# EAGLE board fabenergy.node.v2 (EAGLE 5.11)
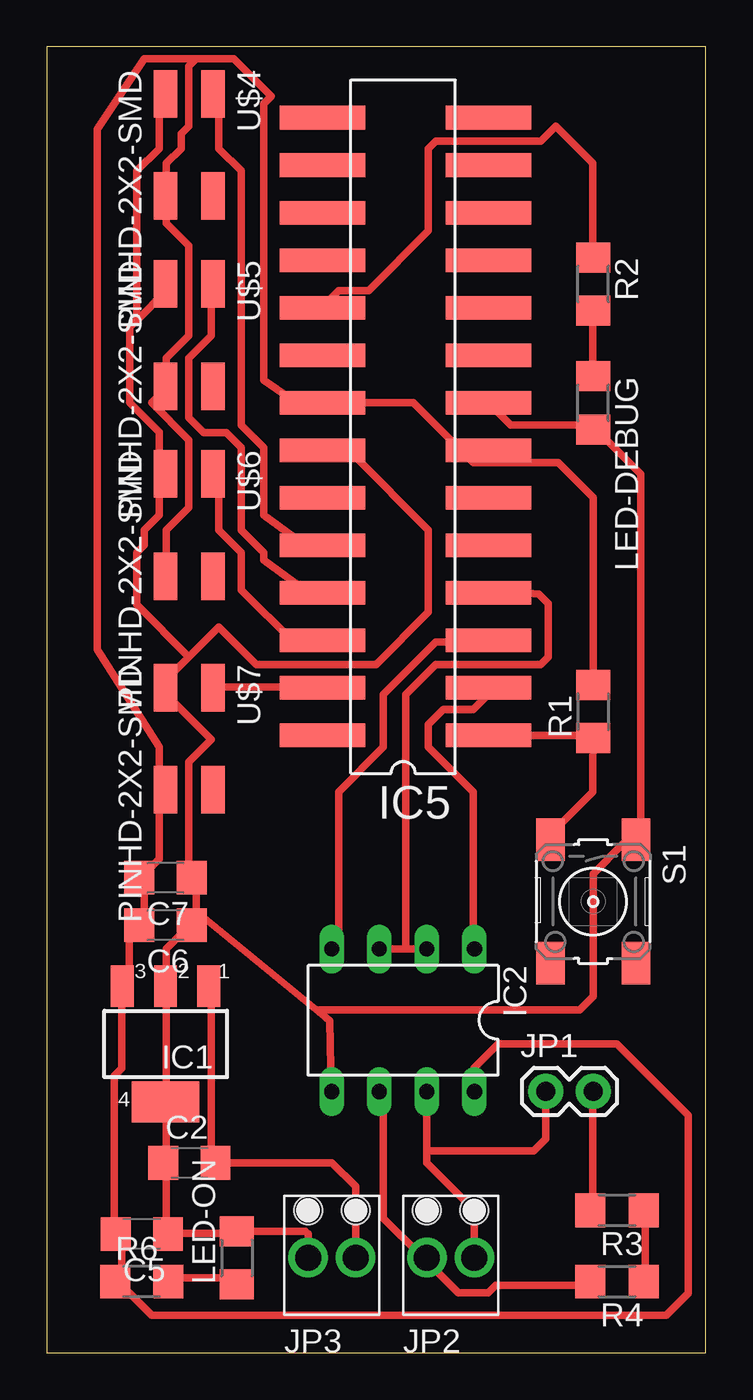
[diagram p0: board, top side]

Size 35.23 x 69.84 mm. Coordinates in mm from the lower left corner, seen from the top.
Outline: 0,0 35.23,0 35.23,69.84 0,69.84 0,0
Copper layers (1*16): Top 0.035mm / dielectric 1.5mm / Bottom 0.035mm
Design rules "fab-tets": minimum track width 0.4068mm, minimum drill 24mil, track to track 0.4mm, track to pad 0.4mm, pad to pad 0.4mm, via to via 0.4mm, smd to smd 14mil, copper to edge 8mil, drill to drill 8mil, minimum pad ring 10mil, minimum via ring 8mil, stop-mask expansion 4mil, vias tented up to drill 0mil, thermal gap 10mil
Net classes: 0 default: width 0.203 mm; 1 power: width 0.254 mm

## Footprints (pad centres in the part's own frame; a part is rotated, then mirrored left to right if it is on the bottom)
C1206 = smd 1.6 x 1.8: 1 -1.4,0; 2 1.4,0
SOT223 = smd 1.219 x 2.235: 1 -2.311,-3.099; 2 0,-3.099; 3 2.311,-3.099 | smd 3.6 x 2.2: 4 0,3.099
DIL08 = drill 0.813 long: 1 -3.81,-3.81; 2 -1.27,-3.81; 3 1.27,-3.81; 4 3.81,-3.81; 5 3.81,3.81; 6 1.27,3.81; 7 -1.27,3.81; 8 -3.81,3.81
DIL28-3-FAB-SMD = smd 1.27 x 4.572: P$1 -16.51,-4.572; P$2 -13.97,-4.572; P$3 -11.43,-4.572; P$4 -8.89,-4.572; P$5 -6.35,-4.572; P$6 -3.81,-4.572; P$7 -1.27,-4.572; P$8 1.27,-4.572; P$9 3.81,-4.572; P$10 6.35,-4.572; P$11 8.89,-4.572; P$12 11.43,-4.572; P$13 13.97,-4.572; P$14 16.51,-4.572; P$15 16.51,4.318; P$16 13.97,4.318; P$17 11.43,4.318; P$18 8.89,4.318; P$19 6.35,4.318; P$20 3.81,4.318; P$21 1.27,4.318; P$22 -1.27,4.318; P$23 -3.81,4.318; P$24 -6.35,4.318; P$25 -8.89,4.318; P$26 -11.43,4.318; P$27 -13.97,4.318; P$28 -16.51,4.318
1X02 = drill 1.016 pad 1.88 round: 1 0,0; 2 2.54,0
SCREW_2 = drill 1.4 pad 2.108 round: 1 -1.27,-1.27; 2 1.27,-1.27 | hole 1.5: 1.27,1.27; -1.27,1.27
1206 = smd 1.6 x 1.803: 1 -1.422,0; 2 1.422,0
6MM_SWITCH = smd 2.286 x 1.524: 1 -3.302,2.286; 2 3.302,2.286; 3 -3.302,-2.286; 4 3.302,-2.286
2X02SMD = smd 2.54 x 1.27: 1 -2.54,1.27; 2 2.92,1.27; 3 -2.54,-1.27; 4 2.92,-1.27

## Placement (x,y rotation side)
C2  1  [C1206]  7.62,10.16 0 top
C5  10u  [C1206]  5.08,6.35 180 top
C6  10u  [C1206]  6.35,22.86 180 top
C7  10u  [C1206]  6.35,25.4 180 top
IC1  LM2936MP-5.0  [SOT223]  6.35,16.51 180 top
IC2  MAX481CPA  [DIL08]  19.05,17.78 180 top
IC5  ATMEGA168-PUDIP-SMD-FAB  [DIL28-3-FAB-SMD]  19.05,49.53 90 top
JP1  [1X02]  26.67,13.97 0 top
JP2  [SCREW_2]  21.59,6.35 0 top
JP3  [SCREW_2]  15.24,6.35 0 top
LED-DEBUG  [1206]  29.21,50.8 270 top
LED-ON  [1206]  10.16,5.08 90 top
R1  10k  [1206]  29.21,34.29 90 top
R2  330  [1206]  29.21,57.15 270 top
R3  100  [1206]  30.48,7.62 180 top
R4  10  [1206]  30.48,3.81 180 top
R6  1k  [1206]  5.08,3.81 0 top
S1  BT  [6MM_SWITCH]  29.21,24.13 270 top
U$4  PINHD-2X2-SMD  [2X02SMD]  7.62,64.77 270 top
U$5  PINHD-2X2-SMD  [2X02SMD]  7.62,54.61 270 top
U$6  PINHD-2X2-SMD  [2X02SMD]  7.62,44.45 270 top
U$7  PINHD-2X2-SMD  [2X02SMD]  7.62,33.02 270 top

## Library data of the parts
C2 C5-C7 = rcl
IC1 = national-semiconductor; MF: NATIONAL SEMICONDUCTOR; MPN: LM2936MP-5.0/NOPB; OC_FARNELL: 1469063; OC_NEWARK: 41K4524
IC2 = maxim
IC5 = Arduino-AVR
JP1 = SparkFun
JP2 JP3 LED-DEBUG LED-ON R1-R4 R6 S1 = ng
U$4-U$7 = fab

## Nets
+12V: C2.2 IC1.1 JP3.2
A: IC2.6 JP2.1 R4.2
B: IC2.7 JP1.1 JP2.2
CT-0: IC5.P$23
CT-1: IC5.P$24 U$4.1
CT-2: IC5.P$25 U$5.1
CT-3: IC5.P$26 U$6.1
CT-4: IC5.P$27 U$7.1
CT-5: IC5.P$28
DE: IC2.2 IC2.3 IC5.P$4
GND: C2.1 C5.1 C6.1 C7.1 IC1.2 IC1.4 IC2.5 IC5.P$8 IC5.P$22 JP3.1 LED-DEBUG.2 LED-ON.2 S1.1 U$4.3 U$5.3 U$6.3 U$7.3
N$1: LED-ON.1 R6.2
N$2: LED-DEBUG.1 R2.2
N$3: R3.1 R4.1
N$5: IC5.P$19 R2.1
N$8: JP1.2 R3.2
RST: IC5.P$1 R1.1 S1.3
RX: IC2.1 IC5.P$2
TX: IC2.4 IC5.P$3
VCC: C5.2 C6.2 C7.2 IC1.3 IC2.8 IC5.P$7 IC5.P$21 R1.2 R6.1 U$4.4 U$5.4 U$6.4 U$7.4

## Tracks (layer width: path | path; a pad name or v marks a point on that pad's centre or on a via)
+12V
  Top 0.406: C2.2 15.24,10.16 16.51,8.89 JP3.2
  Top 0.407: C2.2 8.8,10.4 8.8,19.6 IC1.1
A
  Top 0.407: R4.2 28.8,3.6 24,3.6 23.6,3.2 22,3.2 20.4,4.8 JP2.1 20,5.2 18,7.2 18,13.6 IC2.6
B
  Top 0.406: 20.32,10.79 20.32,10.16 22.86,7.62 JP2.2 | IC2.7 20.32,10.79 | 20.32,10.79 26.04,10.79 26.67,11.43 JP1.1
CT-1
  Top 0.407: U$4.1 9.2,67.2 9.2,64.4 10.4,63.2 10.4,49.6 11.6,48.4 11.6,44.8 14,43.03 14.4,42.8 IC5.P$24
CT-2
  Top 0.407: U$5.1 8.8,56.8 8.8,54.4 7.6,53.2 7.6,50 8.4,49.2 9.6,49.2 10.4,48.4 10.4,44 11.6,42.8 11.6,42.4 14,40.63 14.4,40.4 IC5.P$25
CT-3
  Top 0.407: U$6.1 9.2,46.8 9.2,44 10.4,42.8 10.4,40.8 13.2,38 14.4,38 IC5.P$26
CT-4
  Top 0.407: U$7.1 9.2,35.6 14.4,35.6 IC5.P$27
DE
  Top 0.407: 19.2,21.6 20,21.6 IC2.2 | 19.2,21.6 18,21.6 IC2.3 | 19.2,21.6 19.2,35.2 20.8,36.8 26.4,36.8 26.8,37.2 26.8,40.07 26.3,40.56 24,40.8 IC5.P$4
GND
  Top 0.406: 24.8,49.6 29.14,49.6 31.75,46.99 31.75,27.69 S1.1 | 14.45,18.33 28.49,18.33 29.21,19.05 29.21,25.61 30.8,27.2 | 6,49.2 6,49.24 4.45,50.8 4.45,54.84 4.8,55.2 | LED-ON.2 13.82,6.5 13.97,6.35 JP3.1
  Top 0.407: LED-DEBUG.2 29.2,49.6 24.8,49.6 23.6,50.8 IC5.P$8 | 30.8,27.2 31.2,27.2 S1.1 | 15.13,17.74 15.2,14 IC2.5 | 15.13,17.74 14.45,18.33 | 6,49.2 6,47.2 U$6.3 6,46.8 6,44.8 5.2,44 5.2,43.2 4.8,42.8 4.8,40 7.6,37.2 | U$5.3 6.4,56.8 4.8,55.2 4.8,63.2 6,64.4 6,67.2 U$4.3 | LED-ON.2 10,6.4 6.8,6.4 C5.1 6.4,6.4 6.4,10 C2.1 6.4,10.4 6.4,13.2 IC1.4 6.4,13.6 6.4,19.6 IC1.2 6.4,20 6.4,21.6 7.6,22.8 C6.1 | 8,23.6 8,25.2 C7.1 7.6,25.6 7.6,31.6 8.8,32.8 6.4,35.2 U$7.3 6,35.6 7.6,37.2 | 8,23.6 8,23.2 C6.1 | 7.6,37.2 9.2,38.8 11.2,36.8 17.6,36.8 20.4,39.6 20.4,44 16.4,48 14.8,48 IC5.P$22 | 8,23.6 15.13,17.74 | C6.1 8,23.6
N$1
  Top 0.407: R6.2 6.8,4 10,4 LED-ON.1
N$2
  Top 0.407: LED-DEBUG.1 29.2,52.4 29.2,55.6 R2.2
N$3
  Top 0.407: R4.1 32,4 32,7.6 R3.1
N$5
  Top 0.407: R2.1 29.2,58.8 29.2,63.6 27.2,65.6 26.4,64.8 20.8,64.8 20.4,64.4 20.4,60 17.2,56.8 15.6,56.8 14.8,56 IC5.P$19
N$8
  Top 0.407: R3.2 29.2,8 29.2,13.6 JP1.2
RST
  Top 0.406: IC5.P$1 29.06,33.02 R1.1
  Top 0.407: R1.1 29.2,31.2 29.2,30 26.8,27.6 S1.3
RX
  Top 0.407: IC2.1 22.8,21.6 22.8,30 20.4,32.4 20.4,33.6 21.2,34.4 22.8,34.4 23.6,35.2 IC5.P$2
TX
  Top 0.407: IC2.4 15.6,21.6 15.6,30 18,32.4 18,35.2 20.8,38 23.6,38 IC5.P$3
VCC
  Top 0.406: 22.8,47.6 27.33,47.6 29.21,45.72 R1.2 | 32.8,2 33.12,2 34.29,3.17 34.29,12.7 30.48,16.51 24.13,16.51 22.86,15.24 IC2.8
  Top 0.407: 32.8,2 5.6,2 4,3.6 R6.1 4,4 4,6 C5.2 3.6,6.4 3.6,14.8 4,15.2 4,19.6 IC1.3 4.4,20 4.4,22.4 4.8,22.8 C6.2 5.2,23.2 5.2,25.2 C7.2 5.2,25.6 6,26.4 6,30 U$7.4 6,30.4 6,32.4 2.71,37.6 2.71,65.44 5.2,69.2 8,69.2 | IC2.8 23.2,14 | U$6.4 6.4,41.6 6.4,44 7.6,45.2 7.6,48.8 5.6,50.8 6.4,51.6 U$5.4 6.4,52 6.4,53.2 7.6,54.4 7.6,59.2 6.4,60.4 6.4,61.6 U$4.4 6.4,62 6.4,63.6 7.2,64.4 7.2,65.2 7.6,65.6 7.6,68.8 8,69.2 | IC5.P$7 23.6,48.4 22.8,47.6 19.6,50.8 IC5.P$21 14.4,50.8 13.6,50.63 11.6,52 11.6,66.8 12,67.2 10,69.2 8,69.2